# Altium PCB PCB3.PcbDoc
Units mm, origin at the board's own origin, x right, y up, seen from the top; angles counter-clockwise.
Board outline 100 x 100 mm, 2 copper layers (Top Layer, Bottom Layer), stack 0.771 mm thick; 112 components, 64 nets, 307 pads, 54 vias.
Unrouted connection lines stored in the file: 125.
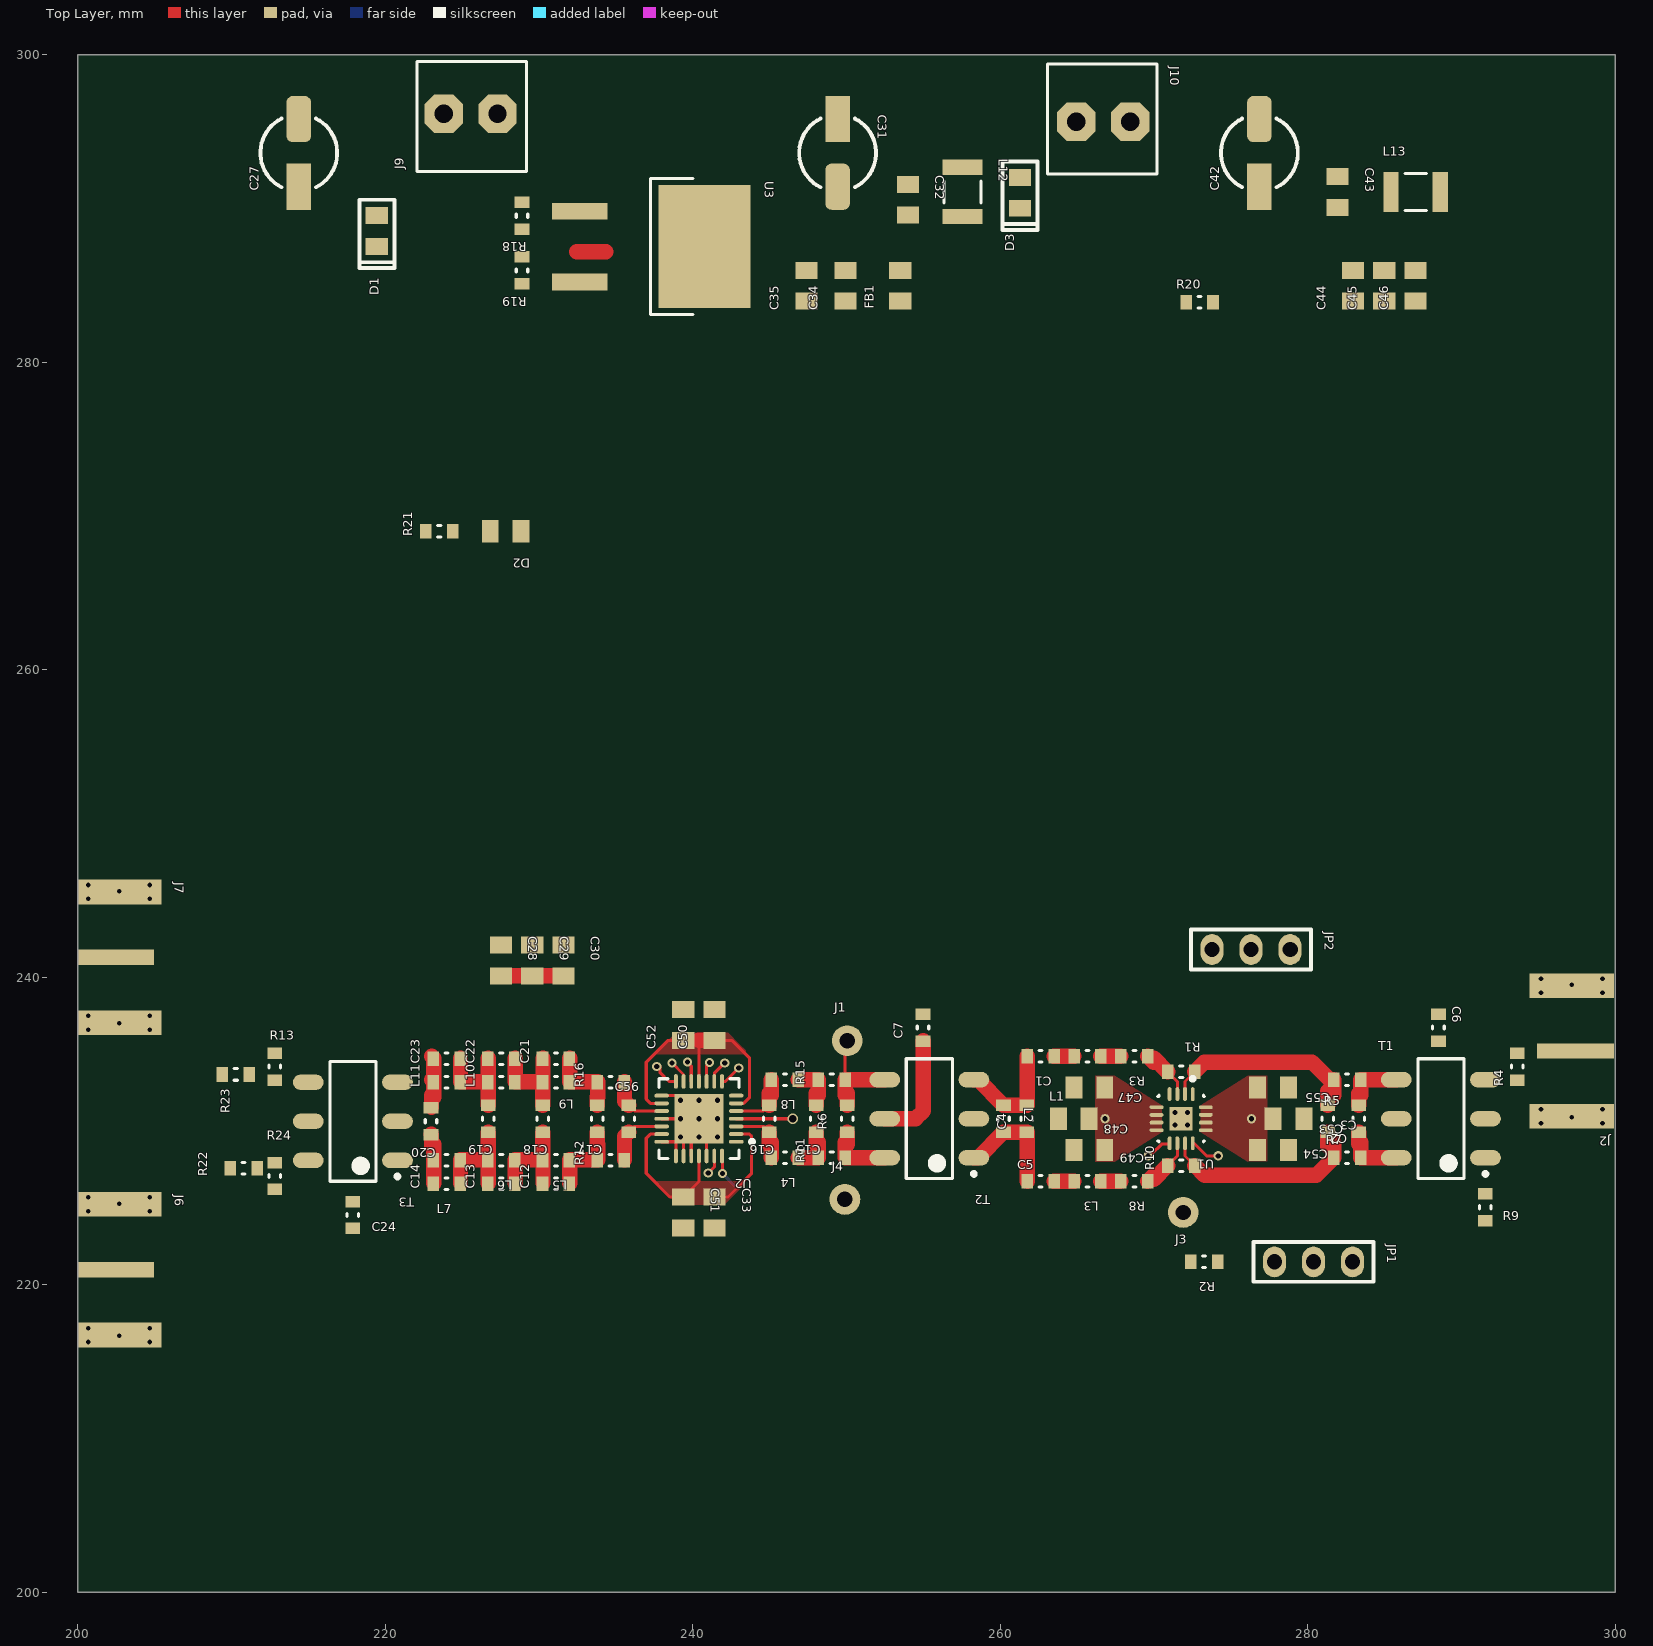
[diagram p0: Top Layer view]
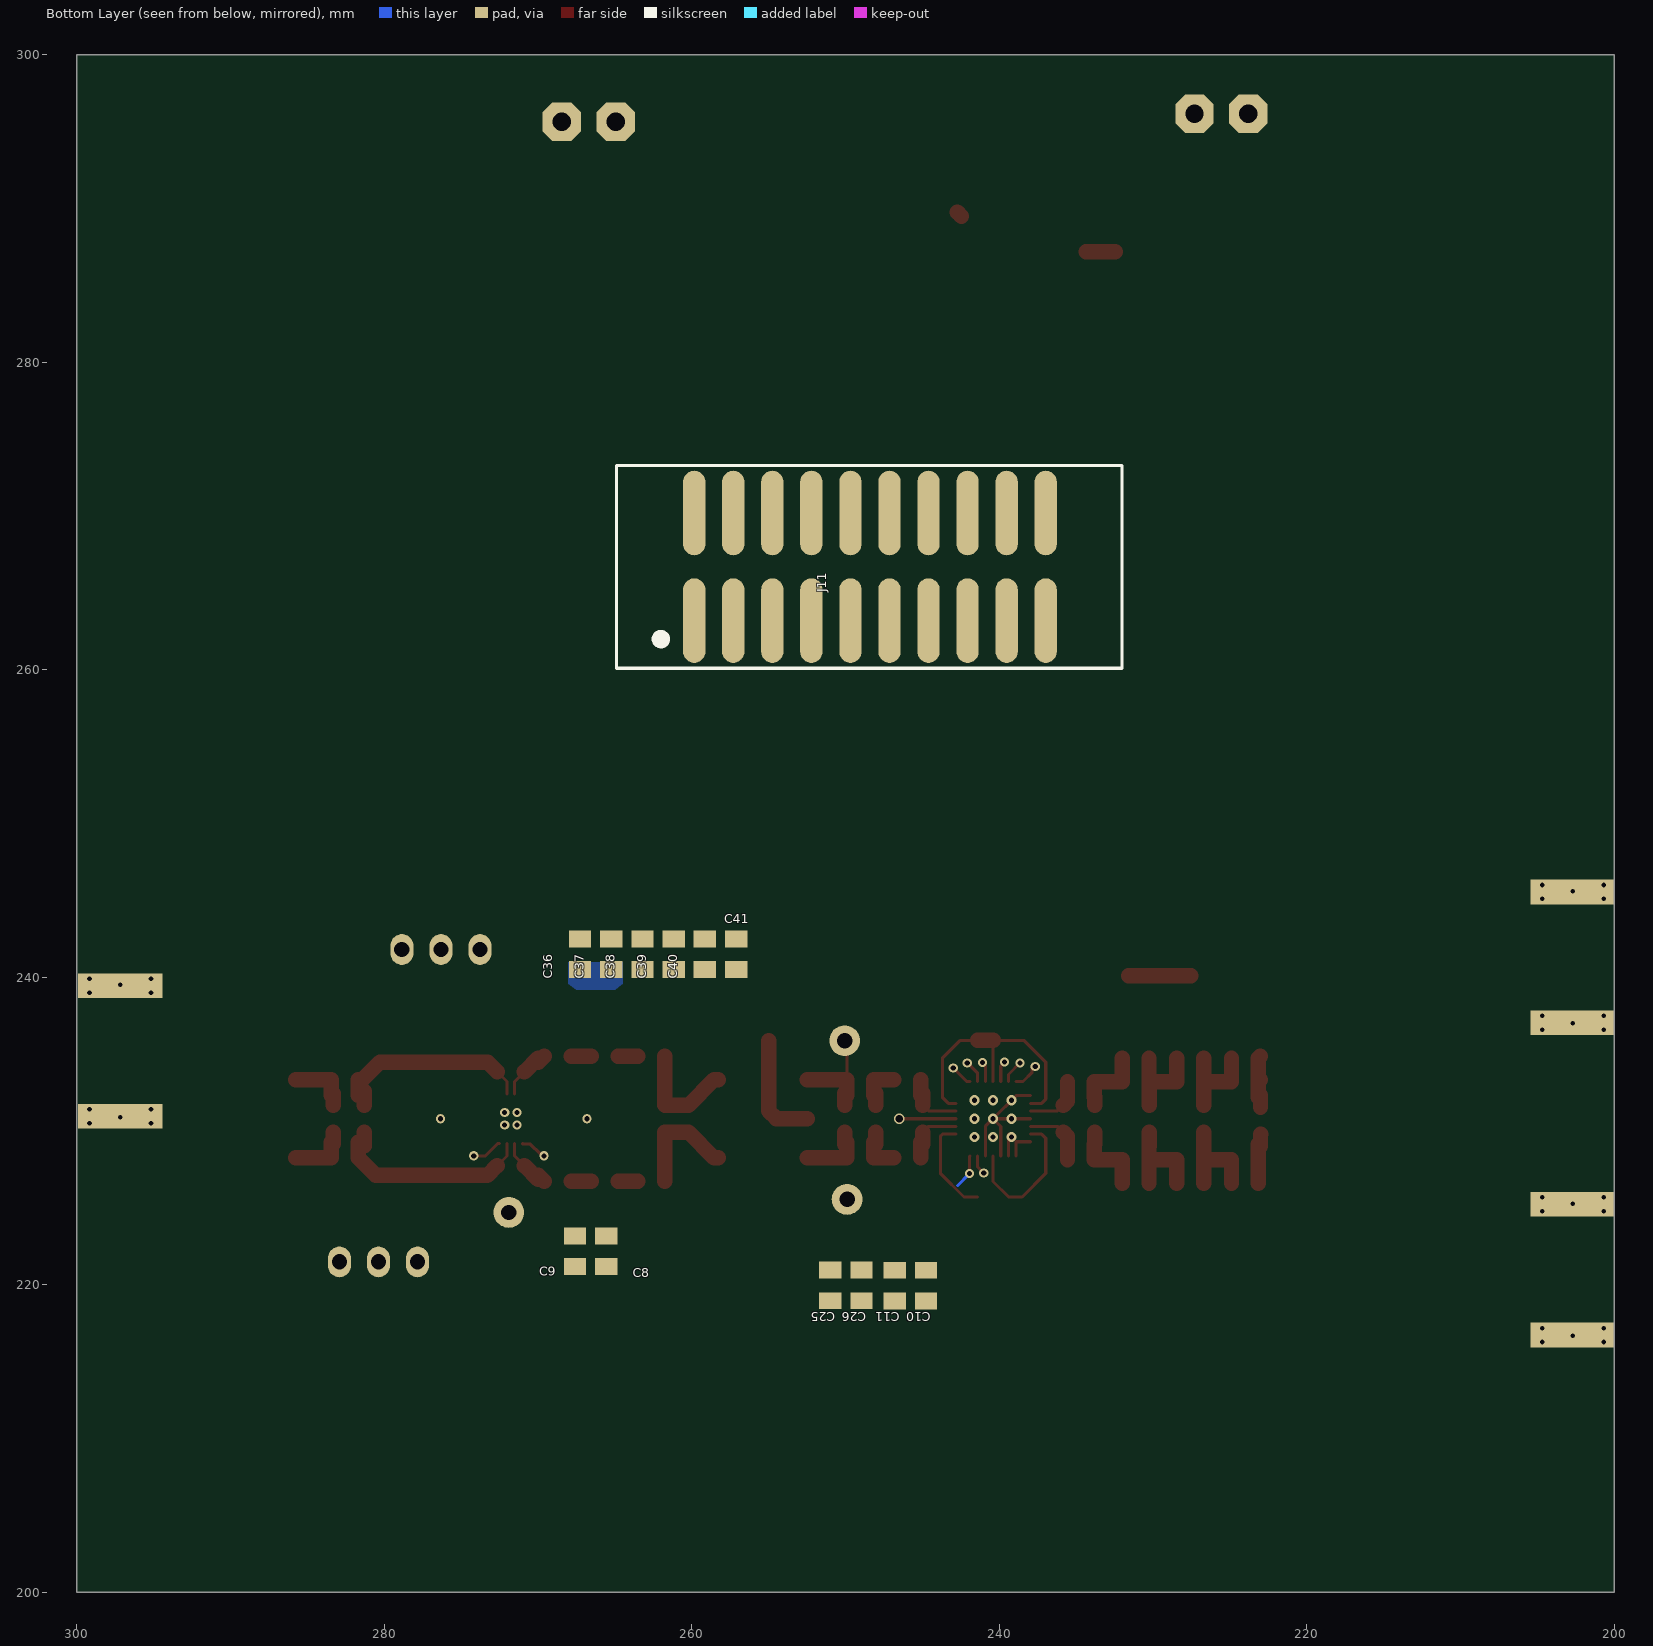
[diagram p1: Bottom Layer view, seen from below]

## Layer stack, top to bottom
Top Layer: signal copper 0.0356
Dielectric: core 0.7, FR-4, Dk 4.8
Bottom Layer: signal copper 0.0356

## Board outline
200,200 300,200 300,300 200,300

## Design rules (kind name [scope] priority, off if disabled: settings)
Clearance [All] p1: gap=0.15
PlaneClearance [All] p1: clearance=0.15
PlaneConnect [All] p1: planeconnectstyle=Direct reliefexpansion=0.508 reliefentries=4 reliefconductorwidth=150 reliefairgap=0.254
PolygonConnect [All] p1: connectstyle=Direct reliefconductorwidth=150 reliefentries=4 polygonreliefangle="90 Angle"
RoutingCorners [All] p1: cornerstyle=Round minsetback=9 maxsetback=9
RoutingVias [All] p1: holewidth=0.333 width=0.6 viastyle="Through Hole" minholewidth=0.333 minwidth=0.6 maxholewidth=0.333 maxwidth=0.6
SilkscreenOverComponentPads [All] p1: minsilkscreentomaskgap=0.254
SolderMaskExpansion [All] p1: expansion=0.102
Width [All] p1: maxlimit=1.5 minlimit=0.2 preferedwidth=1
24 further rules are at their usual default settings.

## Classes and differential pairs
component class Sheet_power_1: C27 C28 C29 C30 C31 C32 C33 C34 C35 C36 C37 C38 C39 C40 C41 C42 C43 C44 C45 C46 D1 D2 D3 FB1 J9 J10 J11 JP2 L12 L13 R18 R19 R20 R21 U3
component class Sheet_Amp_1: C1 C2 C3 C4 C5 C6 C7 C8 C9 C10 C11 C12 C13 C14 C15 C16 C17 C18 C19 C20 C21 C22 C23 C24 C25 C26 C47 C48 C49 C50 C51 C52 C53 C54 C55 C56 J1 J2 J3 J4 J6 J7 JP1 L1 L2 L3 L4 L5 L6 L7 L8 L9 L10 L11 R1 R2 R3 R4 R5 R6 R7 R8 R9 R10 R11 R12 R13 R15 R16 R22 R23 R24 T1 T2 T3 U1 U2

## Components (designator, comment, footprint, x,y, rotation, side; value= is the part's Value field where it differs from the comment)
C1 "C" C_0603 262.63,234.864 r180 top
C2 "C" C_0603 283.331,230.8 r270 top
C3 "TEST" C_0603 281.299,230.8 r270 top
C4 "C" C_0603 261.741,230.8 r90 top
C5 "C" C_0603 262.63,226.736 r180 top
C6 "C" C_0603 288.509,236.728 r90 top
C7 "C" C_0603 254.981,236.728 r90 top
C8 "C" C_0805 265.569,222.176 r270 bottom
C9 "C" C_0805 267.601,222.176 r270 bottom
C10 "C" C_0805 244.769,219.946 r270 bottom
C11 "C" C_0805 246.801,219.946 r270 bottom
C12 "C" C_0603 231.105,226.568 r180 top
C13 "C" C_0603 227.549,226.568 r180 top
C14 "C" C_0603 223.993,226.568 r180 top
C15 "C" C_0603 248.025,230.8 r270 top
C16 "C" C_0603 244.977,230.8 r270 top
C17 "C" C_0603 233.801,230.8 r270 top
C18 "C" C_0603 230.245,230.8 r270 top
C19 "C" C_0603 226.689,230.8 r270 top
C20 "C" C_0603 222.977,230.632 r270 top
C21 "C" C_0603 231.105,234.696 r180 top
C22 "C" C_0603 227.549,234.696 r180 top
C23 "C" C_0603 223.993,234.696 r180 top
C24 "C" C_0603 217.897,224.536 r270 top
C25 "C" C_0805 250.992,219.962 r270 bottom
C26 "C" C_0805 248.96,219.962 r270 bottom
C27 "CPOL" "C_SMD_5.0 X 5.4" 214.376,293.624 r90 top
C28 "C" C_0805 227.527,241.09 r270 top
C29 "C" C_0805 229.559,241.09 r270 top
C30 "C" C_0805 231.591,241.09 r270 top
C31 "CPOL" "C_SMD_5.0 X 5.4" 249.428,293.624 r270 top
C32 "C" C_0805 254,290.576 r270 top
C33 "C" C_0805 241.421,224.704 r270 top
C34 "C" C_0805 249.936,284.988 r90 top
C35 "C" C_0805 247.396,284.988 r90 top
C36 "C" C_0805 267.278,241.496 r90 bottom
C37 "C" C_0805 265.246,241.496 r90 bottom
C38 "C" C_0805 263.214,241.496 r90 bottom
C39 "C" C_0805 261.182,241.496 r90 bottom
C40 "C" C_0805 259.15,241.496 r90 bottom
C41 "C" C_0805 257.118,241.496 r90 bottom
C42 "CPOL" "C_SMD_5.0 x 5.4" 276.86,293.624 r90 top
C43 "C" C_0805 281.94,291.084 r270 top
C44 "C" C_0805 282.956,284.988 r90 top
C45 "C" C_0805 284.988,284.988 r90 top
C46 "C" C_0805 287.02,284.988 r90 top
C47 "C" C_0805 265.805,232.832 r180 top
C48 "C" C_0805 264.789,230.8 r180 top
C49 "C" C_0805 265.805,228.768 r180 top
C50 "C" C_0805 241.421,236.896 r90 top
C51 "C" C_0805 239.389,224.704 r270 top
C52 "C" C_0805 239.389,236.896 r90 top
C53 "C" C_0805 278.759,230.8 r0 top
C54 "C" C_0805 277.743,228.768 r0 top
C55 "C" C_0805 277.743,232.832 r0 top
C56 "C" C_0603 235.833,230.8 r90 top
D1 "D" DZENER_0805 219.456,288.544 r90 top
D2 "LED" LED_0805 227.829,269.013 r180 top
D3 "D" DZENER_0805 261.284,291.024 r90 top
FB1 "Ferrita" R_0805 253.492,284.988 r90 top
J1 "TEST POINT" TEST_POINT 250.057,235.88 r0 top
J2 "Input" SMA_CONECTOR 297.18,235.204 r180 top
J3 "TEST POINT" TEST_POINT 271.901,224.704 r180 top
J4 "TEST POINT" TEST_POINT 249.901,225.552 r0 top
J6 "Output" SMA_CONECTOR 202.692,220.98 r0 top
J7 "Output" SMA_CONECTOR 202.692,241.3 r0 top
J9 "Power VS+" BORNA_PT_2 225.552,296.164 r90 top
J10 "Power VS-" BORNA_PT_2 266.7,295.656 r270 top
J11 "Header 2x10" HEADER_10X2_SMD 248.412,266.7 r90 bottom
JP1 "SHUNT" JUMPER_2,54_3 280.381,221.488 r0 top
JP2 "SHUNT" JUMPER_2,54_3 276.317,241.808 r0 top
L1 "L" L_0603 265.678,234.864 r180 top
L2 "TEST" L_0603 260.217,230.8 r270 top
L3 "L" L_0603 265.678,226.736 r180 top
L4 "L" L_0603 245.993,228.26 r180 top
L5 "L" L_0603 231.105,228.092 r180 top
L6 "L" L_0603 227.549,228.092 r180 top
L7 "L" L_0603 223.993,228.092 r180 top
L8 "L" L_0603 245.993,233.34 r180 top
L9 "L" L_0603 231.105,233.172 r180 top
L10 "L" L_0603 227.549,233.172 r180 top
L11 "L" L_0603 223.993,233.172 r180 top
L12 "L" L_1210 257.556,291.084 r270 top
L13 "L" L_1210 287.02,291.084 r0 top
R1 "R" R_0603 271.774,233.848 r180 top
R2 "R" R_0603 273.269,221.488 r180 top
R3 "R" R_0603 268.726,234.864 r180 top
R4 "TEST" R_0603 293.624,234.188 r270 top
R5 "R" R_0603 282.569,233.34 r180 top
R6 "TEST" R_0603 250.057,230.8 r90 top
R7 "R" R_0603 282.569,228.26 r180 top
R8 "R" R_0603 268.726,226.736 r180 top
R9 "TEST" R_0603 291.557,225.044 r270 top
R10 "R" R_0603 271.774,227.752 r180 top
R11 "TEST" R_0603 249.041,228.26 r180 top
R12 "R" R_0603 234.661,228.092 r180 top
R13 "TEST" R_0603 212.817,234.188 r90 top
R15 "TEST" R_0603 249.041,233.34 r180 top
R16 "R" R_0603 234.661,233.172 r180 top
R18 "R" R_0603 228.896,289.536 r270 top
R19 "R" R_0603 228.896,285.98 r270 top
R20 "R" R_0603 272.968,283.912 r180 top
R21 "R" R_0603 223.511,269.013 r180 top
R22 "TEST" R_0603 210.785,227.584 r180 top
R23 "TEST" R_0603 210.277,233.68 r180 top
R24 "TEST" R_0603 212.817,227.076 r90 top
T1 "Transformer_center_tab" TRASFORMADOR_2.54 288.665,230.8 r180 top
T2 "Transformer_center_tab" TRASFORMADOR_2.54 255.391,230.8 r180 top
T3 "Transformer_center_tab" TRASFORMADOR_2.54 217.897,230.632 r180 top
U1 "THS4509" QFN_16 271.774,230.8 r270 top
U2 "PGA870" QFN_28 240.405,230.8 r180 top
U3 "VOLTAGE_REGULATOR_3" REG_DPAK 238.76,287.528 r0 top

## Footprints (in the part's own frame and the unit in brackets; to place one, negate y for a bottom-side part, rotate by r counter-clockwise, add the part's x,y. Pads: shape width x height; smd on the part's side, far side on the other; paste and mask are expansions set on the pad)
BORNA_PT_2 [mm]
  oct 2.5x2.5 hole 1.2: 1(0,1.75) 2(0,-1.75)
  silkscreen extent -3.76,-3.63 3.4,3.5, body extent -3.86,-3.51 3.43,3.6, height 8.51
C_0603 [mm] "Chip Resistor, 2-Leads, Body 1.6x0.8mm, IPC Medium Density"
  rect 0.75x0.95 smd: 1(-0.875,0) 2(0.875,0)
  silkscreen extent -0.1,-0.38 0.1,0.38, body extent -0.8,-0.4 0.8,0.4, height 0.3
C_0805 [mm] "Chip Capacitor, 2-Leads, Body 2,0x1,3mm, IPC Medium Density"
  rect 1.1x1.45 smd: 1(-1,0) 2(1,0)
  body extent -1,-0.63 1,0.63, height 0.78
"C_SMD_5.0 X 5.4" [mm]
  rect 3x1.6 smd: 1(-2.2,0)
  rrect50% 3x1.6 smd: 2(2.2,0)
  silkscreen extent -2.24,-2.5 2.24,2.5, body extent -2.95,-2.67 2.95,2.63, height 5.41
"C_SMD_5.0 x 5.4" [mm]
  rect 3x1.6 smd: 1(-2.2,0)
  rrect50% 3x1.6 smd: 2(2.2,0)
  silkscreen extent -2.24,-2.5 2.24,2.5, body extent -2.95,-2.67 2.95,2.63, height 5.41
DZENER_0805 [mm]
  rect 1.1x1.45 smd: A(1,0) K(-1,0)
  silkscreen extent -2.41,-1.14 2.03,1.14, body extent -1.13,-0.64 0.87,0.57, height 1.22
HEADER_10X2_SMD [mm] "SOP, 20-Leads, Body 32.8x6.9mm (max), Pitch 2.54mm, IPC Medium Density"
  oval 5.5x1.45 smd: 1(-3.5,11.43) 2(3.5,11.43) 3(-3.5,8.89) 4(3.5,8.89) 5(-3.5,6.35) 6(3.5,6.35) 7(-3.5,3.81) 8(3.5,3.81) 9(-3.5,1.27) 10(3.5,1.27) 11(-3.5,-1.27) 12(3.5,-1.27) 13(-3.5,-3.81) 14(3.5,-3.81) 15(-3.5,-6.35) 16(3.5,-6.35) 17(-3.5,-8.89) 18(3.5,-8.89) 19(-3.5,-11.43) 20(3.5,-11.43)
  silkscreen extent -6.6,-16.4 6.6,16.5
JUMPER_2,54_3 [mm]
  oval 1.5x2 hole 1: 1(-2.54,0) 2(0,0) 3(2.54,0)
  silkscreen extent -3.9,-1.3 3.9,1.3, body extent -3.8,-1.27 1.2,1.27, height 9.5
L_0603 [mm] "Chip Resistor, 2-Leads, Body 1.6x0.8mm, IPC Medium Density"
  rect 0.75x0.95 smd: 1(-0.875,0) 2(0.875,0)
  silkscreen extent -0.1,-0.38 0.1,0.38, body extent -0.8,-0.4 0.8,0.4, height 0.8
L_1210 [mm] "Chip Inductor, 2-Leads, Body 3,2x2,5mm, IPC Medium Density"
  rect 1x2.6 smd: 1(-1.6,0) 2(1.6,0)
  silkscreen extent -0.7,-1.2 0.7,1.2, body extent -1.6,-1.37 1.6,1.13, height 2.5
LED_0805 [mm]
  rect 1.1x1.45 smd: A(-1,0) K(1,0)
  body extent -1.03,-0.53 1.03,0.38, height 0.85
QFN_16 [mm] "QFN, 16-Leads, Body 2.8x2.8mm (max), Pitch 0.50mm, IPC Medium Density"
  oval 0.9x0.25 smd: 1(-1.6,0.75) 2(-1.6,0.25) 3(-1.6,-0.25) 4(-1.6,-0.75) 9(1.6,-0.75) 10(1.6,-0.25) 11(1.6,0.25) 12(1.6,0.75)
  oval 0.25x0.9 smd: 5(-0.75,-1.6) 6(-0.25,-1.6) 7(0.25,-1.6) 8(0.75,-1.6) 13(0.75,1.6) 14(0.25,1.6) 15(-0.25,1.6) 16(-0.75,1.6)
  rect 1.5x1.5 smd: 17(0,0)
  silkscreen extent -2.72,-1.53 1.53,1.53, body extent -1.54,-1.5 1.5,1.54, height 0.9
QFN_28 [mm] "QFN, 28-Leads, Body 5.2x5.2mm (max), Pitch 0.50mm, IPC Medium Density"
  oval 0.95x0.25 smd: 1(-2.425,1.5) 2(-2.425,1) 3(-2.425,0.5) 4(-2.425,0) 5(-2.425,-0.5) 6(-2.425,-1) 7(-2.425,-1.5) 15(2.425,-1.5) 16(2.425,-1) 17(2.425,-0.5) 18(2.425,0) 19(2.425,0.5) 20(2.425,1) 21(2.425,1.5)
  oval 0.25x0.95 smd: 8(-1.5,-2.425) 9(-1,-2.425) 10(-0.5,-2.425) 11(0,-2.425) 12(0.5,-2.425) 13(1,-2.425) 14(1.5,-2.425) 22(1.5,2.425) 23(1,2.425) 24(0.5,2.425) 25(0,2.425) 26(-0.5,2.425) 27(-1,2.425) 28(-1.5,2.425)
  rect 3.2x3.2 smd: 29(0,0)
  silkscreen extent -3.57,-2.6 2.6,2.6, body extent -2.52,-2.52 2.52,2.52, height 0.9
R_0603 [mm] "Chip Resistor, 2-Leads, Body 1.6x0.8mm, IPC Medium Density"
  rect 0.75x0.95 smd: 1(-0.875,0) 2(0.875,0)
  silkscreen extent -0.1,-0.38 0.1,0.38, body extent -0.8,-0.4 0.8,0.4, height 0.3
R_0805 [mm] "Chip Resistor Body 2,0x1,3mm, IPC Medium Density"
  rect 1.1x1.45 smd: 1(-1,0) 2(1,0)
  body extent -1.02,-0.64 0.98,0.62, height 0.78
REG_DPAK [mm]
  rect 3.6x1.1 smd: GND(-6.1,2.3) IN(-6.1,-2.3)
  rect 6x8 smd: OUT(2,0)
  silkscreen extent -1.5,-4.42 1.27,4.42, body extent -5.93,-3.28 4,3.26, height 2.34
SMA_CONECTOR [mm]
  rect 5x1 smd: 1(-0.25,0)
  rect 5.5x1.6 smd: 2(0,4.25) 2(0,-4.25)
  rect 5.5x1.6 smd far side: 2(0,4.25) 2(0,-4.25)
  body extent -11.53,-4.86 2.3,4.66, height 3.96
TEST_POINT [mm]
  round 2 hole 1: 1(0,0)
TRASFORMADOR_2.54 [mm] "SOP, 6-Leads, Body 7.8x5.6mm (max), Pitch 2.54mm, IPC Medium Density"
  oval 2x1 smd: 1(-2.9,2.54) 2(-2.9,0) 3(-2.9,-2.54) 4(2.9,-2.54) 5(2.9,0) 6(2.9,2.54)
  silkscreen extent -3.03,-3.9 1.5,3.9, body extent -2.8,-3.9 2.8,3.9, height 2.65

## Part data
C3: library part C
J9 J10: library part BORNA_2
L2: library part L
R4 R6 R9 R11 R13 R15 R22 R23 R24: library part R

## Free pads (board coordinates)
  round 0.6 hole 0.333: 0(276.346,230.8) 5(266.821,230.8)

## Via types
v1: diameter 0.5, hole 0.3, Top Layer to Bottom Layer, 30 vias
v2: diameter 0.66, hole 0.33, Top Layer to Bottom Layer, tented top, 9 vias
v3: diameter 0.6, hole 0.333, Top Layer to Bottom Layer, 9 vias
v4: diameter 0.6, hole 0.33, Top Layer to Bottom Layer, tented top, 4 vias
v5: diameter 0.7, hole 0.5, Top Layer to Bottom Layer, 1 vias
v6: diameter 0.6, hole 0.33, Top Layer to Bottom Layer, 1 vias

## Nets (pads, with @x,y where several pads share a name; then routed paths per layer and width w, separated by ;. In a path a pad name is that pad's centre, name@x,y a point inside that pad or via, vN(x,y) a via of type N, cw(c..) or ccw(c..) an arc to the next point about the centre after c; other vN are vias at no path point)
AMP1+: J4.1 R6.1 R11.1 T2.6 | length 4.6
  Top Layer w1: R6.1 250.057,229.135 249.916,229.276 R11.1 T2.6
AMP1-: J1.1 R6.2 R15.1 T2.4 | length 7.2
  Top Layer w0.2: R15.1 249.916,235.739 J1.1
  Top Layer w1: R6.2 250.057,232.465 249.916,232.324 R15.1 T2.4
B0: J11.1 U2.14 | length 1.7
  Top Layer w0.2: v3@237.865,234.229 237.865,233.823 238.462,233.225 U2.14
  other v3: 237.662,234.204
B1: J11.2 U2.13 | length 1.7
  Top Layer w0.2: v3(238.652,234.432) 239.405,233.68 U2.13
  Bottom Layer w0.2: v3@238.652,234.229 v3(238.652,234.432)
B2: J11.3 U2.12 | length 1.4
  Top Layer w0.2: v3(239.668,234.483) 239.668,234.458 239.905,234.221 U2.12
  Bottom Layer w0.2: v3@239.617,234.483 v3(239.668,234.483)
B3: J11.4 U2.10 | length 1
  Top Layer w0.2: U2.10 v3@240.905,234.272
  other v3: 241.091,234.458
B4: J11.5 U2.9 | length 1.5
  Top Layer w0.2: U2.9 241.405,233.756 v3(242.081,234.432)
B5: J11.6 U2.8 | length 1.5
  Top Layer w0.2: U2.8 242.119,233.225 v3(242.996,234.102)
D\I\S\A\B\L\E\: J11.9 U2.27 | length 1.3
  Top Layer w0.2: v3(241.014,227.269) 241.405,227.66 U2.27
GND: C6.2 C7.2 C8.2 C9.2 C10.2 C11.2 C24.2 C25.2 C26.2 C27.1 C28.2 C29.2 C30.2 C31.1 C32.2 C33.2 C34.2 C35.2 C36.2 C37.2 C38.2 C39.2 C40.2 C41.2 C42.1 C43.2 C44.2 C45.2 C46.2 C47.2 C48.2 C49.2 C50.2 C51.2 C52.2 C53.2 C54.2 C55.2 D1.A D3.K J2.2 J6.2 J7.2 J9.2 J10.2 J11.12 JP1.3 R9.2 R13.2 R19.2 R20.2 R21.2 R24.1 U1.17 U2.15 U2.18 U2.21 U2.22 U2.23 U2.24 U2.26 U2.29 | length 18.1
  Top Layer w0.2: U2.21 238.905,229.3 U2.22 ; U2.18 v2(240.405,230.8) ; U2.15 238.905,232.3 v2(240.405,230.8) ; U2.23 U2.29@239.405,229.8 ; U2.24 239.905,230.3 v2(240.405,230.8) ; U2.26 240.905,230.3 v2(240.405,230.8)
  Top Layer w1: C28.2 C29.2 C30.2
  other v1: 200.692,216.28 204.692,216.28 202.692,216.68 200.692,217.18 204.692,217.18 200.692,224.78 204.692,224.78 202.692,225.28 200.692,225.68 204.692,225.68 295.18,230.504 299.18,230.504 297.18,230.904 295.18,231.404 299.18,231.404 200.692,236.6 204.692,236.6 202.692,237 200.692,237.5 204.692,237.5 295.18,239.004 299.18,239.004 297.18,239.504 295.18,239.904 299.18,239.904 200.692,245.1 204.692,245.1 202.692,245.6 200.692,246 204.692,246
  other v2: 239.205,229.6 240.405,229.6 241.605,229.6 239.205,230.8 241.605,230.8 239.205,232 240.405,232 241.605,232
  other v4: 271.374,230.4 272.174,230.4 271.374,231.2 272.174,231.2
LATCH: J11.8 U2.1
LED: D2.A J11.10
NetC1_1: C1.1 L1.2 | length 1.3
  Top Layer w1: C1.1 L1.2
NetC1_2: C1.2 C4.2 L2.1 T2.3 | length 7.3
  Top Layer w1: T2.3 258.552,233.34 L2.1 C4.2 261.755,231.689 C1.2
NetC2_1: C2.1 R5.1 T1.4 | length 4.3
  Top Layer w1: C2.1 283.331,232.437 283.444,232.324 R5.1 T1.4
NetC2_2: C2.2 R7.1 T1.6 | length 4.3
  Top Layer w1: C2.2 283.331,229.163 283.444,229.276 R7.1 T1.6
NetC3_1: C3.1 R1.1 R5.2 U1.2 | length 13.9
  Top Layer w0.2: U1.2 272.024,233.223 R1.1
  Top Layer w1: R1.1 273.284,234.483 280.283,234.483 281.426,233.34 R5.2 281.694,232.324 281.44,232.578 281.299,232.578 C3.1
NetC3_2: C3.2 R7.2 R10.1 U1.11 | length 13.9
  Top Layer w0.2: U1.11 272.024,228.377 R10.1
  Top Layer w1: R10.1 272.663,227.752 273.298,227.117 280.551,227.117 R7.2 281.694,229.276 281.44,229.022 281.299,229.022 C3.2
NetC4_1: C4.1 C5.2 L2.2 T2.1 | length 7.3
  Top Layer w1: T2.1 258.552,228.26 L2.2 C4.1 261.755,229.911 C5.2
NetC5_1: C5.1 L3.2 | length 1.3
  Top Layer w1: C5.1 L3.2
NetC6_1: C6.1 T1.5
NetC7_1: C7.1 T2.5 | length 7.3
  Top Layer w1: T2.5 254.502,230.8 255.01,231.308 254.996,231.322 C7.1@254.996,235.88
NetC8_1: C8.1 C9.1 J3.1 U1.4 U1.9 | length 1.7
  Top Layer w0.2: v3(269.615,228.387) 269.742,228.514 269.869,228.514 270.504,229.149 270.973,229.149 U1.9
NetC10_1: C10.1 C11.1 U2.28 | length 2.3
  Top Layer w0.2: U2.28 241.929,228.351 v6(241.929,227.244)
  Bottom Layer w0.2: v6(241.929,227.244) 242.723,226.45
NetC12_1: C12.1 C17.2 L5.1 R12.2 | length 5.2
  Top Layer w1: C12.1@232.009,226.609 232.009,228.133 233.815,228.133 233.815,229.149 233.801,229.135 C17.2
NetC12_2: C12.2 C13.1 C18.2 L5.2 L6.1 | length 6.7
  Top Layer w1: C13.1@228.453,226.609 228.453,228.133 L5.2@230.259,228.133 ; C18.2 230.245,229.022 230.259,229.036 L5.2@230.259,228.133 ; C12.2@230.259,226.609 L5.2@230.259,228.133
NetC13_2: C13.2 C14.1 C19.2 L6.2 L7.1 | length 6.7
  Top Layer w1: C14.1@224.897,226.609 224.897,228.133 L6.2@226.703,228.133 ; C19.2 226.689,229.022 226.703,229.036 L6.2@226.703,228.133 ; C13.2@226.703,226.609 L6.2@226.703,228.133
NetC14_2: C14.2 C20.2 L7.2 T3.1 | length 3.5
  Top Layer w1: C20.2@222.992,229.784 223.006,229.798 223.006,229.008 223.147,229.149 223.147,228.133 C14.2@223.147,226.609
NetC15_1: C15.1 L8.1 R15.2 | length 3.3
  Top Layer w1: L8.1 R15.2 248.166,232.324 248.025,232.465 C15.1
NetC15_2: C15.2 L4.1 R11.2 | length 3.3
  Top Layer w1: L4.1 R11.2 248.166,229.276 248.025,229.135 C15.2
NetC16_1: C16.1 L8.2 U2.5 | length 4.3
  Top Layer w0.2: U2.5 244.602,231.3 C16.1
  Top Layer w1: C16.1 244.977,232.465 245.118,232.324 L8.2
NetC16_2: C16.2 L4.2 U2.3 | length 4.3
  Top Layer w0.2: U2.3 244.602,230.3 C16.2
  Top Layer w1: C16.2 244.977,229.135 245.118,229.276 L4.2
NetC17_1: C17.1 C21.1 L9.1 R16.2 | length 4.9
  Top Layer w1: C21.1@232.009,234.737 232.009,233.213 233.815,233.213 233.815,232.197 233.801,232.211 C17.1
NetC18_1: C18.1 C21.2 C22.1 L9.2 L10.1 | length 6.4
  Top Layer w1: C22.1@228.453,234.737 228.453,233.213 L9.2@230.259,233.213 ; C18.1 230.245,232.578 230.259,232.564 L9.2@230.259,233.213 ; C21.2@230.259,234.737 L9.2@230.259,233.213
NetC19_1: C19.1 C22.2 C23.1 L10.2 L11.1 | length 6.4
  Top Layer w1: C23.1@224.897,234.737 224.897,233.213 L10.2@226.703,233.213 ; C19.1 226.689,232.211 226.703,232.197 L10.2@226.703,233.213 ; C22.2@226.703,234.737 L10.2@226.703,233.213
NetC20_1: C20.1 C23.2 L11.2 T3.3 | length 3.9
  Top Layer w1: C20.1@223.006,231.548 223.006,232.338 223.147,232.197 L11.2@223.147,233.213 ; L11.2@223.02,233.34 L11.2@223.147,233.213 ; C23.2@223.02,234.864 223.147,234.737 L11.2@223.147,233.213
NetC24_1: C24.1 T3.5
NetC25_1: C25.1 C26.1 U2.4 | length 3.7
  Top Layer w0.2: U2.4 v5(246.501,230.8)
NetC27_2: C27.2 C28.1 C29.1 C30.1 D1.K J9.1 U3.IN | length 1.9
  Top Layer w1: 232.457,287.2 234.356,287.2
NetC31_2: C31.2 C32.1 L12.1 R18.1 U3.OUT | length 0.4
  Top Layer w1: U3.OUT@242.456,289.5 U3.OUT@242.726,289.77
NetC42_2: C42.2 C43.1 D3.A J10.1 L13.1
NetC56_1: C56.1 R12.1 U2.19 | length 4.2
  Top Layer w0.2: C56.1 236.208,230.3 U2.19
  Top Layer w1: R12.1@235.565,228.133 235.565,229.657 C56.1
NetC56_2: C56.2 R16.1 U2.17 | length 4
  Top Layer w0.2: C56.2 236.208,231.3 U2.17
  Top Layer w1: R16.1@235.565,233.213 235.565,231.943 C56.2
NetD2_K: D2.K R21.1
NetJ2_1: J2.1 R4.1
NetJ6_1: J6.1 R22.2
NetJ7_1: J7.1 R23.2
NetJP1_1: JP1.1 R2.1
NetJP1_2: JP1.2 U1.12 | length 2
  Top Layer w0.2: U1.12 272.612,229.2 273.425,228.387 v3(274.187,228.387)
NetJP2_1: JP2.1 R20.1
NetL1_1: L1.1 R3.2 | length 1.3
  Top Layer w1: L1.1 R3.2
NetL3_1: L3.1 R8.2 | length 1.3
  Top Layer w1: L3.1 R8.2
NetR1_2: R1.2 R3.1 U1.3 | length 3.8
  Top Layer w0.2: R1.2 271.524,233.223 U1.3
  Top Layer w1: R3.1 269.996,234.469 269.996,234.751 R1.2
NetR4_2: R4.2 T1.3
NetR8_1: R8.1 R10.2 U1.10 | length 3.8
  Top Layer w0.2: R10.2 271.524,228.377 U1.10
  Top Layer w1: R8.1 269.996,227.131 269.996,226.849 R10.2
NetR9_1: R9.1 T1.1
NetR13_1: R13.1 R23.1 T3.4
NetR18_2: R18.2 R19.1 U3.GND
NetR22_1: R22.1 R24.2 T3.6
STROBE: J11.7 U2.7
V+_AMP1: C36.1 C37.1 C38.1 C39.1 C40.1 C41.1 C47.1 C48.1 C49.1 FB1.2 pad.5 R2.2 U1.5 U1.6 U1.7 U1.8
V+_AMP2: C33.1 C34.1 C35.1 C50.1 C51.1 C52.1 FB1.1 L12.2 U2.2 U2.6 U2.11 U2.16 U2.20 U2.25 | length 33.7
  Top Layer w0.2: U2.20 237.246,229.8 236.976,229.53 236.976,227.244 238.516,225.704 C51.1 240.405,226.72 U2.25 ; U2.16 237.246,231.8 236.976,232.07 236.976,234.483 238.373,235.88 240.389,235.88 240.405,235.896 240.421,235.88 240.421,233.241 U2.11 ; C33.1 242.294,225.704 243.834,227.244 243.834,229.657 243.691,229.8 U2.2 ; C50.1 242.056,235.896 242.072,235.88 242.564,235.88 243.707,234.737 243.707,232.187 243.694,232.174 243.684,232.174 243.31,231.8 U2.6
  Top Layer w1: 240.405,235.896 C50.1
VS+_EXT: C44.1 C45.1 C46.1 JP2.3 L13.2
VS-: C53.1 C54.1 C55.1 JP2.2 pad.0 U1.13 U1.14 U1.15 U1.16
pads on no net: J11.11 J11.13 J11.14 J11.15 J11.16 J11.17 J11.18 J11.19 J11.20 T1.2 T2.2 T3.2 U1.1

## Polygon pours and split planes (outlines as drawn)
V+_AMP1 on Top Layer "Top Layer-No Net" (solid, pour order 1003): 270.504,229.911 267.456,228.006 266.186,228.006 266.186,233.594 267.456,233.594 270.504,231.689
VS- on Top Layer "Top Layer-No Net" (solid, pour order 1002): 277.362,228.018 276.092,228.006 273.044,229.911 273.044,231.689 276.092,233.594 277.362,233.594
V+_AMP2 on Top Layer "Top Layer-No Net" (solid, pour order 1000): 238.754,236.388 242.056,236.388 242.31,236.388 243.072,235.626 243.439,235.258 243.439,235.004 237.497,235.004 237.479,234.986 238.754,236.261 238.754,236.388
V+_AMP2 on Top Layer "Top Layer-No Net" (solid, pour order 1001): 238.754,225.212 242.056,225.212 243.321,226.477 243.321,226.731 237.489,226.731 237.465,226.755 238.754,225.466 238.754,225.212
V+_AMP1 on Bottom Layer "Top Layer-No Net" (solid, pour order 1000): 266.643,239.185 267.405,239.185 267.532,239.185 267.913,239.47 268.04,239.564 268.04,240.988 264.484,240.988 264.484,239.564 264.992,239.185 266.643,239.185

## Silkscreen, mask and mechanical layers (free items; w line width, h text height)
Mechanical 1:
  the board outline again, w0.254